# Altium PCB PCB.PcbDoc (part 1 of 2)
Units mm, origin at the board's own origin, x right, y up, seen from the top; angles counter-clockwise.
Board outline 109.77 x 110 mm, 2 copper layers (Top Layer, Bottom Layer); 52 components, 34 nets, 218 pads, 26 vias.
Unrouted connection lines stored in the file: 55.
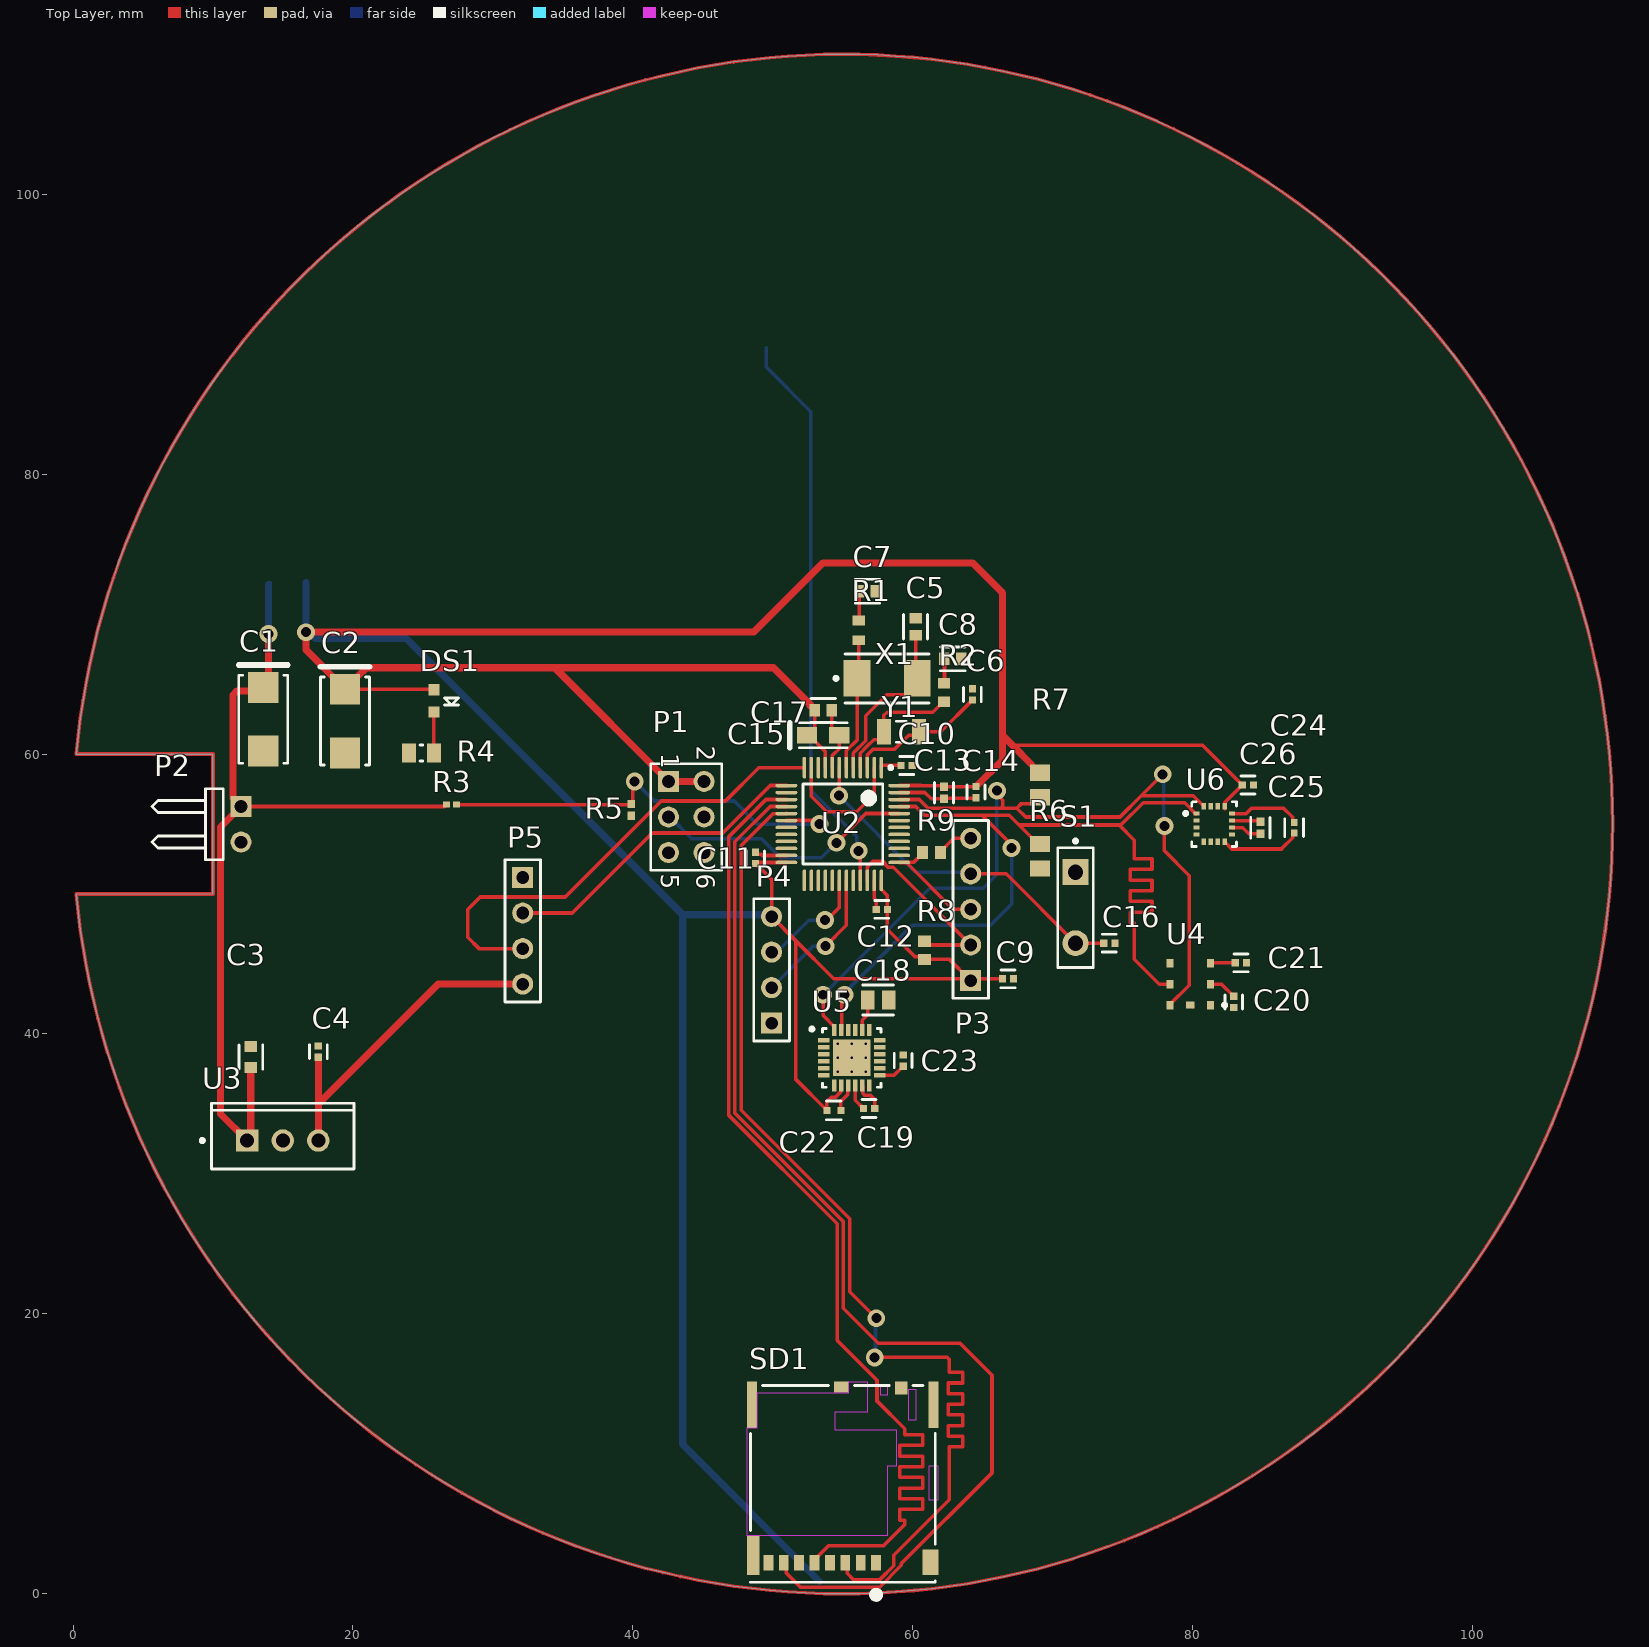
[diagram p0: Top Layer view]
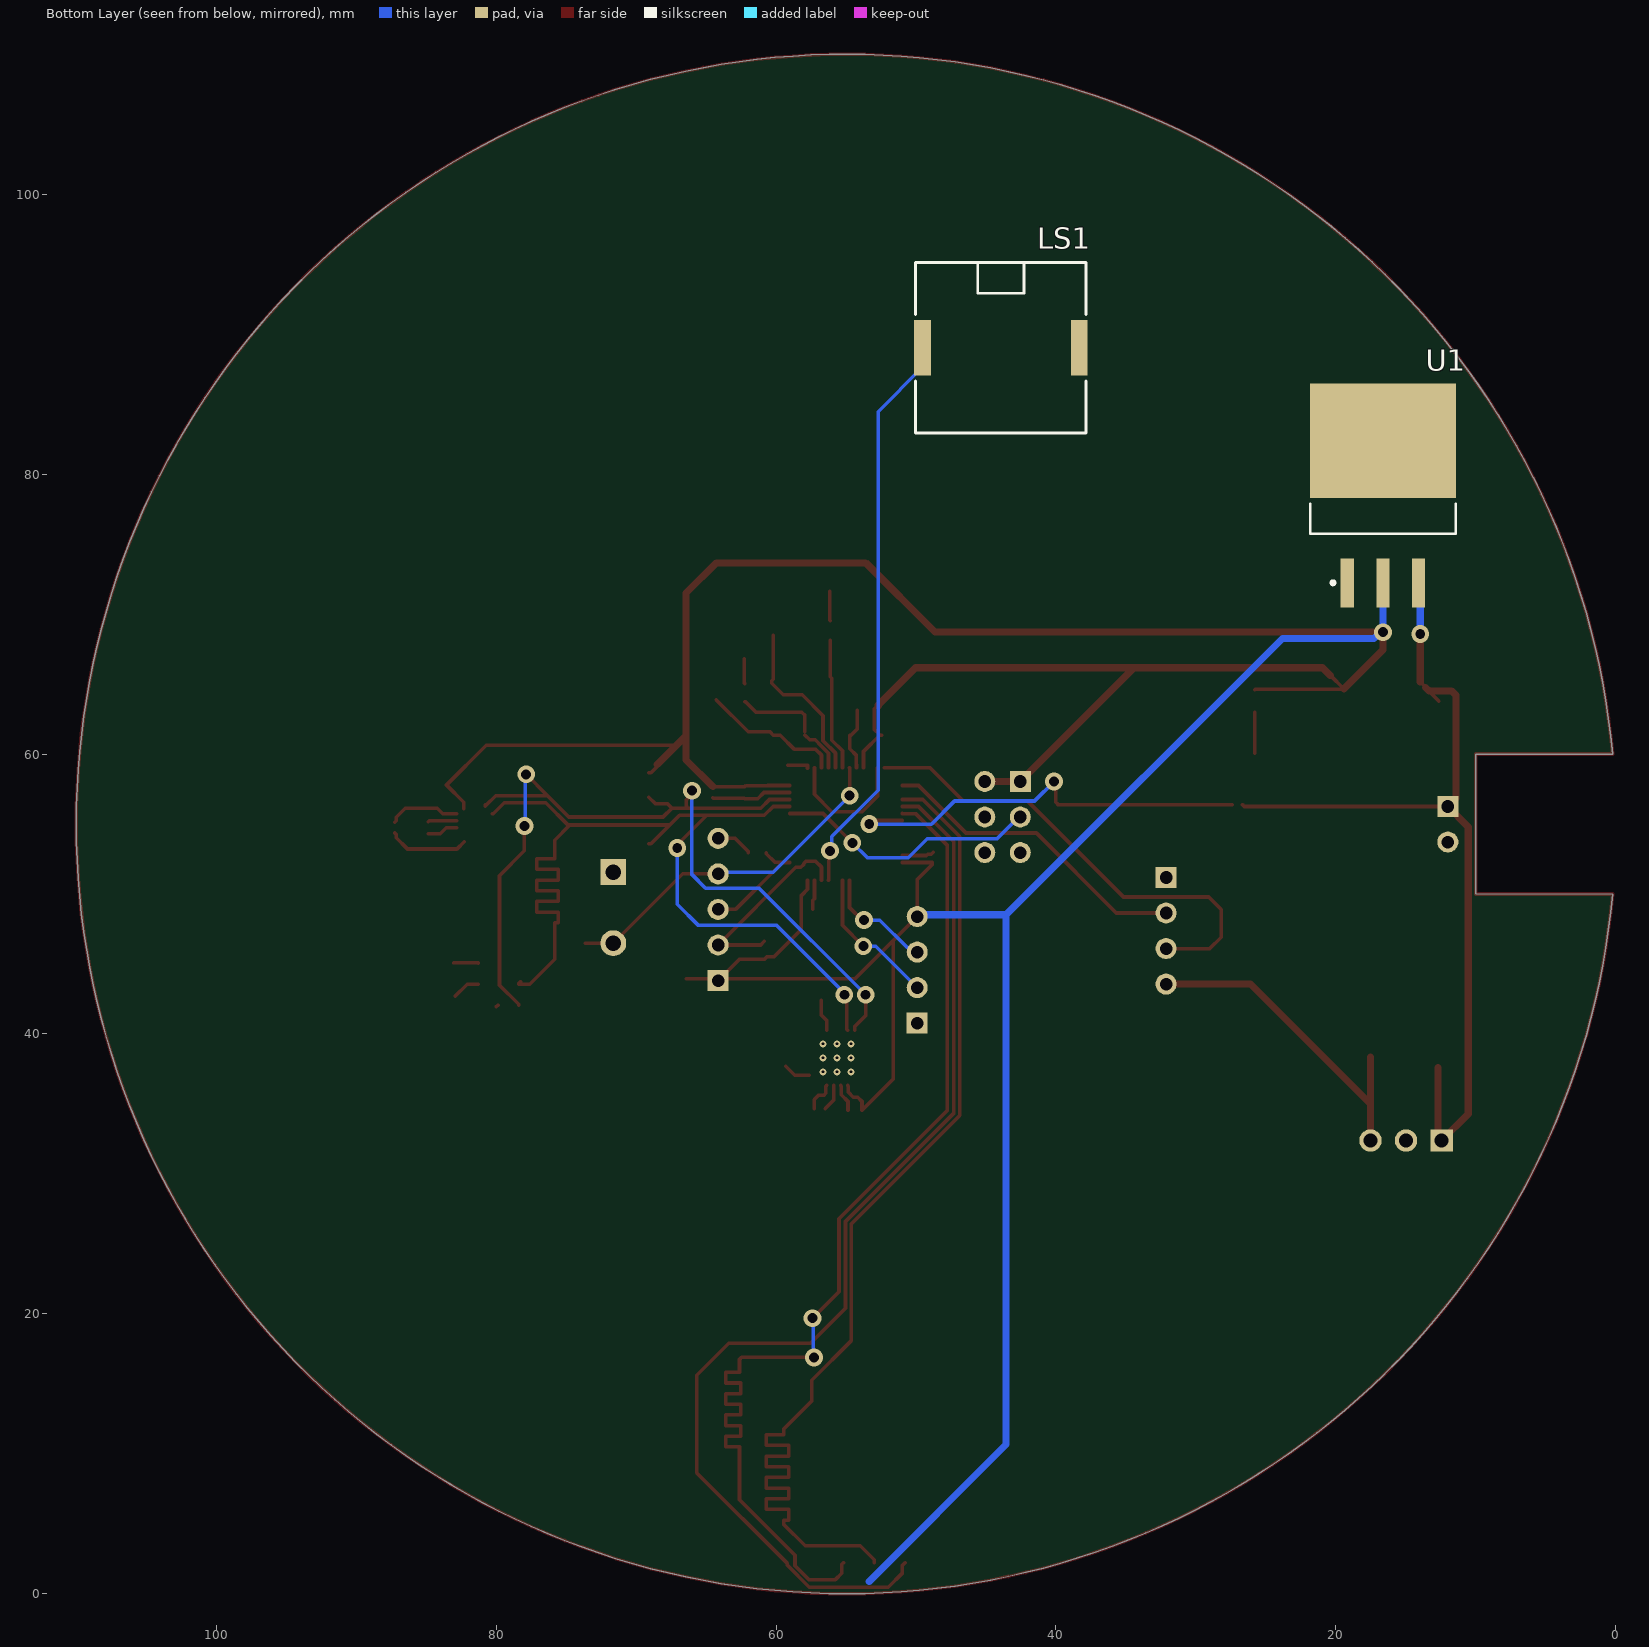
[diagram p1: Bottom Layer view, seen from below]

## Layer stack, top to bottom
Top Solder: solder mask 0.0102, Solder Resist, Dk 3.5
Top Layer: signal copper 0.0356
Dielectric 1: dielectric 0.32, FR-4, Dk 4.8
Bottom Layer: signal copper 0.0356
Bottom Solder: solder mask 0.0102, Solder Resist, Dk 3.5

## Board outline
0.229,49.987 ccw(c55,55) 0.228,60 10,60 10,50

## Design rules (kind name [scope] priority, off if disabled: settings)
Clearance [All] p1: gap=0.1 ignorepadtopadclearanceinfootprint=FALSE except(0: Arc-Hole Track-Hole SMDPad-Hole THPad-Hole Via-Hole Fill-Hole Poly-Hole Region-Hole Text-Hole)
PolygonConnect [All] p1: connectstyle=Relief reliefconductorwidth=0.254 reliefentries=4 polygonreliefangle="90 Angle" airgapwidth=0.254
RoomDefinition Sensors [InComponentClass('Sensors')] p1: confinementstyle=ConfineIn formatcopy=TRUE lockcomponents=FALSE outline 111.125,21.971 127.254,21.971 127.254,40.767 111.125,40.767
RoomDefinition MainBoard [InComponentClass('MainBoard')] p2: confinementstyle=ConfineIn formatcopy=TRUE lockcomponents=FALSE outline 109.474,0 124.968,0 124.968,19.05 109.474,19.05
RoutingVias [All] p1: holewidth=0.711 width=1.27 viastyle="Through Hole" minholewidth=0.711 minwidth=1.27 maxholewidth=0.711 maxwidth=1.27
SMDNeckDown [All] p1: percent=50.000
SolderMaskExpansion [All] p1: expansion=0.102 istentingtop=FALSE
Width [All] p1: maxlimit=0.508 minlimit=0.254 preferedwidth=0.254 minimp=50.000000 maximp=50.000000 favimp=50.000000
30 further rules are at their usual default settings.

## Classes and differential pairs
component class Sensors: C18 C19 C20 C21 C22 C23 C24 C25 C26 LS1 P4 P5 R6 R7 SD1 U4 U5 U6
component class MainBoard: C1 C2 C3 C4 C5 C6 C7 C8 C9 C10 C11 C12 C13 C14 C15 C16 C17 DS1 P1 P2 P3 R1 R2 R3 R4 R5 R8 R9 S1 U1 U2 U3 X1 Y1

## Components (designator, comment, footprint, x,y, rotation, side; value= is the part's Value field where it differs from the comment)
C1 "T491C106K016AT" KEMT-T491-C_L 13.589,62.484 r270 top
C2 "T491C106K016AT" KEMT-T491-C_L 19.431,62.357 r270 top
C3 "CC0603KRX7R7BB334" FP-CC0603-DA-MFG 12.7,38.354 r90 top value="330 nF"
C4 "C0402C104K8PACTU" FP-C0402-BB-MFG 17.526,38.735 r90 top value="0.10 µF"
C5 "C0603C220J4GAC7867" FP-C0603C-CF-MFG 60.198,69.088 r270 top value="22 pF"
C6 "C0402C100K4GACTU" FP-C0402-BB-MFG 64.262,64.262 r270 top value="10 pF"
C7 "C0603C220J4GAC7867" FP-C0603C-CF-MFG 56.769,71.628 r180 top value="22 pF"
C8 "C0603C220J4GAC7867" FP-C0603C-CF-MFG 62.865,66.802 r180 top value="22 pF"
C9 "C0402C104K8PACTU" FP-C0402-BB-MFG 66.802,43.942 r0 top value="0.10 μF"
C10 "C0402C104K8PACTU" FP-C0402-BB-MFG 59.563,59.182 r0 top value="0.10 μF"
C11 "C0402C104K8PACTU" FP-C0402-BB-MFG 48.768,52.578 r90 top value="0.10 µF"
C12 "C0402C104K8PACTU" FP-C0402-BB-MFG 57.785,48.895 r180 top value="0.10 µF"
C13 "GRM155R60J475ME47D" FP-GRM155-0_1-IPC_B 62.23,57.229 r270 top
C14 "C0402C104K8PACTU" FP-C0402-BB-MFG 64.516,57.277 r270 top value="0.10 μF"
C15 "T491A105K016AT" KEMT-T491A105K016AT_L 53.594,61.341 r0 top
C16 "C0402C104K8PACTU" FP-C0402-BB-MFG 74.041,46.482 r0 top value="0.10 μF"
C17 "C0603C103J4HAC7867" FP-C0603C-CF-MFG 53.594,63.119 r0 top value="10,000 pF"
C18 "C0805C222J4GACTU" FP-C0805C-DN-MFG 57.531,42.418 r0 top value="2,200 pF"
C19 "C0402C104K8PACTU" FP-C0402-BB-MFG 56.877,34.671 r0 top value="0.10 μF"
C20 "C0402C104K8PACTU" FP-C0402-BB-MFG 82.931,42.291 r270 top value="0.10 µF"
C21 "C0402C104K8PACTU" FP-C0402-BB-MFG 83.439,45.085 r0 top value="0.10 μF"
C22 "CC0402KRX7R7BB103" FP-CC0402-MFG 54.356,34.544 r0 top value="10 nF"
C23 "C0402C104K8PACTU" FP-C0402-BB-MFG 59.309,38.1 r90 top value="0.10 μF"
C24 "GRM155R71C224KA12D" FP-GRM155-0_05-IPC_C 87.249,54.737 r90 top
C25 "GRM155R60J475ME47D" FP-GRM155-0_1-IPC_B 84.836,54.737 r90 top
C26 "C0402C104K8PACTU" FP-C0402-BB-MFG 83.947,57.785 r0 top value="0.10 μF"
DS1 "150060VS75000" WE-150060VS75000_V 25.781,63.792 r90 top
LS1 "PKLCS1212E2000-R1" FP-PKLCS1212E2000-R1-MFG 43.942,89.027 r180 bottom
P1 "Boot" HDR2X3 42.545,58.039 r270 top
P2 "POWER" HDR1X2H 12,56.25 r270 top locked
P3 "SWD" HDR1X5 64.135,43.815 r90 top
P4 "XBEE" HDR1X4 49.911,40.767 r90 top
P5 "GPS" HDR1X4 32.131,51.181 r270 top
R1 "RC0603FR-07330RL" RESC1608X55X25NL10T15 56.134,68.834 r270 top
R2 "ERJ-3EKF4703V" RESC1608X55X30LL15T15 62.23,64.389 r270 top
R3 "RMCF0402FT1M00" RESC1005X40X25LL10T15 27.051,56.388 r180 top
R4 "RC0805FR-0710KL" RESC2013X60X35NL10T20 24.892,60.071 r180 top
R5 "RC0402FR-07100KL" RESC1005X40X25NL05T10 39.878,56.007 r90 top
R6 "ERJ-6ENF4701V" RESC2013X70X40NL20T20 69.088,52.705 r270 top
R7 "ERJ-6ENF4701V" RESC2013X70X40NL20T20 69.088,57.785 r90 top
R8 "CRCW060310K0FKEA" RESC1609X50X30NL8T20 60.833,45.974 r270 top
R9 "CRCW060310K0FKEA" RESC1609X50X30NL8T20 61.337,52.959 r180 top
S1 "SW-PB" SPST-2 71.628,49.022 r270 top
SD1 "503398-1892" MOLX-503398-1892_V 55,8.5 r180 top
U1 "LD1086D2M33TR" D2PAK_A_L 16.637,78.486 r90 bottom
U2 "STM32F103C8T6" STM-LQFP48_L 55,55 r270 top
U3 "LM7805ACT" FAIR-TO-220-3 14.986,32.385 r90 top
U4 "BMP180" BOSC-BMP180-7_V 79.83,43.561 r180 top
U5 "MPU6050" INSE-QFN-24_V 55.638,38.297 r0 top
U6 "HMC5883L-TR" HONEY-LPCC-16_V 81.534,54.991 r0 top
X1 "ABM7-8.000MHZ-D2Y-T" ABRA-ABM7-2_V 58.166,65.405 r0 top
Y1 "ABS07-120-32.768KHZ-T" ABRA-ABS07_A_V 59.182,61.595 r0 top

## Footprints (in the part's own frame and the unit in brackets; to place one, negate y for a bottom-side part, rotate by r counter-clockwise, add the part's x,y. Pads: shape width x height; smd on the part's side, far side on the other; paste and mask are expansions set on the pad)
ABRA-ABM7-2_V [mm] "SMD, 2-Leads, Body 6x3.5mm"
  rect 1.9x2.6 smd: 1(-2.15,0) 2(2.15,0)
  silkscreen extent -3.77,-1.75 3,1.75, body extent -3,-1.75 3,1.75, height 1.4
ABRA-ABS07_A_V [mm] "SMD, 2-Leads, Body 3.2x1.5mm"
  rect 1x1.8 smd: 1(-1.25,0) 2(1.25,0)
  silkscreen extent -0.35,-0.75 0.35,0.75, body extent -1.6,-0.75 1.6,0.75, height 0.9
BOSC-BMP180-7_V [mm] "LGA, 7-Leads, Body 3.9x3.8mm, Pitch 1.5mm"
  rect 0.5x0.6 smd: 1(-1.45,1.5) 2(-1.45,0) 3(-1.45,-1.5) 4(1.45,-1.5) 5(1.45,0) 6(1.45,1.5)
  rect 0.6x0.5 smd: 7(0,1.5)
  silkscreen extent -2.58,1.38 -2.33,1.62, body extent -1.85,-1.95 1.85,1.95, height 1
D2PAK_A_L [mm] "D2-PAK, 4-Leads, Body 9.2x10.2mm, Pitch 2.54mm, Lead Span 15.4mm, IPC High Density"
  rect 3.5x0.95 smd: 1(-6.25,2.54) 2(-6.25,0) 3(-6.25,-2.54)
  rect 8.2x10.45 smd: 4(3.9,0)
  silkscreen extent -6.37,-5.2 -0.6,5.2, body extent -2.75,-5.2 6.6,5.2, height 4.6
FAIR-TO-220-3 [mm] "FM, 3-Leads, Body 10.2x4.7mm, Pitch 2.54mm"
  rect 1.6x1.6 hole 1: 1(0,2.54)
  round 1.6 hole 1: 2(0,0) 3(0,-2.54)
  silkscreen extent -2.04,-5.1 2.66,5.87, body extent -2.04,-5.1 2.66,5.1, height 18.95
FP-C0402-BB-MFG [mm]
  rect 0.52x0.52 smd paste+0 mask+0: 1(-0.4,0) 2(0.4,0)
  silkscreen extent -0.5,-0.64 0.5,0.64, body extent -0.8,-0.4 0.8,0.4, height 0.25
FP-C0603C-CF-MFG [mm]
  rect 0.75x0.9 smd paste+0 mask+0: 1(-0.6,0) 2(0.6,0)
  silkscreen extent -0.87,-0.85 0.88,0.85, body extent -1.2,-0.6 1.2,0.6, height 0.25
FP-C0805C-DN-MFG [mm]
  rect 0.95x1.35 smd paste+0 mask+0: 1(-0.75,0) 2(0.75,0)
  silkscreen extent -1.1,-1.07 1.1,1.07, body extent -1.4,-0.85 1.4,0.85, height 0.25
FP-CC0402-MFG [mm]
  rect 0.5x0.5 smd paste+0 mask+0: 1(-0.5,0) 2(0.5,0)
  silkscreen extent -0.53,-0.68 0.53,0.67, body extent -0.87,-0.48 0.87,0.48, height 0.25
FP-CC0603-DA-MFG [mm]
  rect 0.8x0.9 smd paste+0 mask+0: 1(-0.75,0) 2(0.75,0)
  silkscreen extent -0.85,-0.85 0.85,0.85, body extent -1.35,-0.75 1.35,0.75, height 0.25
FP-GRM155-0_1-IPC_B [mm]
  rect 0.615x0.572 smd paste+0 mask+0: 1(-0.429,0) 2(0.429,0)
  silkscreen extent -0.74,-0.69 0.74,0.69, body extent -0.89,-0.44 0.89,0.44, height 0.25
FP-GRM155-0_05-IPC_C [mm]
  rect 0.515x0.472 smd paste+0 mask+0: 1(-0.379,0) 2(0.379,0)
  silkscreen extent -0.64,-0.67 0.64,0.67, body extent -0.74,-0.38 0.74,0.38, height 0.25
FP-PKLCS1212E2000-R1-MFG [mm]
  rect 1.2x4 smd paste+0 mask+0: 1(-5.6,0) 2(5.6,0)
  silkscreen extent -6.1,-6.1 6.1,6.1, body extent -6,-6 6,6, height 3.01
HDR1X2H [mm] "Connector; Header; 2 Position; Right Angle"
  rect 1.5x1.5 hole 0.9: 1(0,0)
  round 1.5 hole 0.9: 2(2.54,0)
  silkscreen extent -1.27,-6.35 3.81,-1.27
HDR1X4 [mm] "Connector; Header; 4 Position"
  rect 1.5x1.5 hole 0.9: 1(0,0)
  round 1.5 hole 0.9: 2(2.54,0) 3(5.08,0) 4(7.62,0)
  silkscreen extent -1.27,-1.27 8.89,1.27
HDR1X5 [mm] "Connector; Header; 5 Position"
  rect 1.5x1.5 hole 0.9: 1(0,0)
  round 1.5 hole 0.9: 2(2.54,0) 3(5.08,0) 4(7.62,0) 5(10.16,0)
  silkscreen extent -1.27,-1.27 11.43,1.27
HDR2X3 [mm] "Connector; Header; 3x2 Position"
  rect 1.5x1.5 hole 0.9: 1(0,0)
  round 1.5 hole 0.9: 2(0,2.54) 3(2.54,0) 4(2.54,2.54) 5(5.08,0) 6(5.08,2.54)
  silkscreen extent -1.27,-1.27 6.35,3.81
HONEY-LPCC-16_V [mm] "LPCC, 16-Leads, Body 3x3mm, Pitch 0.5mm"
  rect 0.45x0.3 smd: 1(-1.265,0.75) 2(-1.265,0.25) 3(-1.265,-0.25) 4(-1.265,-0.75) 9(1.275,-0.75) 10(1.275,-0.25) 11(1.275,0.25) 12(1.275,0.75)
  rect 0.3x0.45 smd: 5(-0.75,-1.265) 6(-0.25,-1.265) 7(0.25,-1.265) 8(0.75,-1.265) 13(0.75,1.275) 14(0.25,1.275) 15(-0.25,1.275) 16(-0.75,1.275)
  silkscreen extent -2.16,-1.6 1.6,1.6, body extent -1.5,-1.5 1.5,1.5, height 0.9
INSE-QFN-24_V [mm] "QFN, 24-Leads, Body 4.00x4.00mm, Pitch 0.50mm, Thermal Pad 2.7x2.6mm"
  rect 0.8x0.35 smd: 1(-2,1.25) 2(-2,0.75) 3(-2,0.25) 4(-2,-0.25) 5(-2,-0.75) 6(-2,-1.25) 13(2,-1.25) 14(2,-0.75) 15(2,-0.25) 16(2,0.25) 17(2,0.75) 18(2,1.25)
  rect 0.35x0.85 smd: 7(-1.25,-1.975) 8(-0.75,-1.975) 9(-0.25,-1.975) 10(0.25,-1.975) 11(0.75,-1.975) 12(1.25,-1.975) 19(1.25,1.975) 20(0.75,1.975) 21(0.25,1.975) 22(-0.25,1.975) 23(-0.75,1.975) 24(-1.25,1.975)
  rect 2.7x2.6 smd: 25(0,0)
  silkscreen extent -2.97,-2.1 2.1,2.17, body extent -2,-2 2,2, height 0.95
KEMT-T491-C_L [mm] "Molded Capacitor, 2-Leads, Body 6.30x3.50mm, IPC High Density"
  rect 2.2x2.15 smd: 1(-2.275,0) 2(2.275,0)
  silkscreen extent -3.87,-1.75 3.15,1.75, body extent -3.15,-1.75 3.15,1.75, height 2.79
KEMT-T491A105K016AT_L [mm] "Molded Capacitor, 2-Leads, Body 3.40x1.80mm, IPC High Density"
  rect 1.45x1.15 smd: 1(-1.15,0) 2(1.15,0)
  silkscreen extent -2.38,-0.9 1.7,0.9, body extent -1.92,-0.9 1.92,0.9, height 1.8
MOLX-503398-1892_V [mm] "CONN, 8-Leads, Body 14.05x13.2mm, Pitch 1.1mm"
  rect 0.7x1.1 smd: 1(-2.38,6.27) 2(-1.28,6.27) 3(-0.18,6.27) 4(0.92,6.27) 5(2.02,6.27) 6(3.12,6.27) 7(4.22,6.27) 8(5.32,6.27)
  rect 1.05x0.78 smd: 9(0.095,-6.27)
  rect 0.9x0.93 smd: 10(-4.17,-6.195)
  rect 0.86x2.8 smd: 11(6.4,5.77)
  rect 0.7x3.3 smd: 12(6.48,-5.01) 13(-6.48,-5.01)
  rect 1.14x1.83 smd: 14(-6.26,6.255)
  Top Layer keep-out region: -6.83,-0.63 -6.13,-0.63 -6.13,1.77 -6.83,1.77
  Top Layer keep-out region: -5.235,-6.08 -4.685,-6.08 -4.685,-3.93 -5.235,-3.93
  Top Layer keep-out region: -3.22,-6.28 -2.67,-6.28 -2.67,-5.73 -3.22,-5.73
  Top Layer keep-out region: 6.83,4.37 6.83,-3.36 6.13,-3.36 6.13,-5.88 -0.43,-5.88 -0.43,-6.66 -1.73,-6.66 -1.73,-4.48 0.57,-4.48 0.57,-3.23 -3.82,-3.23 -3.82,-0.63 -3.17,-0.63 -3.17,4.37
  silkscreen extent -6.6,-6.38 6.6,8.82, body extent -6.55,-6.38 6.55,7.67, height 1.28
RESC1005X40X25LL10T15 [mm] "Chip Resistor, 2-Leads, Body 1.1x0.55mm, IPC High Density"
  rect 0.5x0.45 smd: 1(-0.35,0) 2(0.35,0)
  body extent -0.55,-0.28 0.55,0.28, height 0.4
RESC1005X40X25NL05T10 [mm] "Chip Resistor, 2-Leads, Body 1.00x0.50mm, IPC Medium Density"
  rect 0.6x0.55 smd: 1(-0.425,0) 2(0.425,0)
  body extent -0.53,-0.27 0.53,0.28, height 0.4
RESC1608X55X25NL10T15 [mm] "Chip Resistor, 2-Leads, Body 1.70x0.90mm, IPC Medium Density"
  rect 0.7x0.9 smd: 1(-0.7,0) 2(0.7,0)
  body extent -0.85,-0.45 0.85,0.45, height 0.55
RESC1608X55X30LL15T15 [mm] "Chip Resistor, 2-Leads, Body 1.75x0.95mm, IPC High Density"
  rect 0.75x0.85 smd: 1(-0.65,0) 2(0.65,0)
  body extent -0.87,-0.48 0.87,0.48, height 0.55
RESC1609X50X30NL8T20 [mm] "Chip Resistor, 2-Leads, Body 1.65x0.95mm, IPC Medium Density"
  rect 0.8x0.95 smd: 1(-0.65,0) 2(0.65,0)
  body extent -0.82,-0.48 0.82,0.48, height 0.5
RESC2013X60X35NL10T20 [mm] "Chip Resistor, 2-Leads, Body 2.1x1.35mm, IPC Medium Density"
  rect 1x1.35 smd: 1(-0.9,0) 2(0.9,0)
  silkscreen extent -0.1,-0.58 0.1,0.58, body extent -1.05,-0.68 1.05,0.67, height 0.6
RESC2013X70X40NL20T20 [mm] "Chip Resistor, 2-Leads, Body 2.2x1.35mm, IPC Medium Density"
  rect 1.15x1.45 smd: 1(-0.875,0) 2(0.875,0)
  body extent -1.1,-0.72 1.1,0.72, height 0.7
SPST-2 [mm] "Switch; 2 Leads"
  rect 1.85x1.85 hole 1.1: 1(-2.54,0)
  round 1.85 hole 1.1: 2(2.54,0)
  silkscreen extent -4.89,-1.27 4.28,1.27
STM-LQFP48_L [mm] "QFP, 48-Leads, Body 7x7mm, Pitch 0.5mm, IPC High Density"
  oval 1.55x0.25 smd: 1(-4.025,2.75) 2(-4.025,2.25) 3(-4.025,1.75) 4(-4.025,1.25) 5(-4.025,0.75) 6(-4.025,0.25) 7(-4.025,-0.25) 8(-4.025,-0.75) 9(-4.025,-1.25) 10(-4.025,-1.75) 11(-4.025,-2.25) 12(-4.025,-2.75) 25(4.025,-2.75) 26(4.025,-2.25) 27(4.025,-1.75) 28(4.025,-1.25) 29(4.025,-0.75) 30(4.025,-0.25) 31(4.025,0.25) 32(4.025,0.75) 33(4.025,1.25) 34(4.025,1.75) 35(4.025,2.25) 36(4.025,2.75)
  oval 0.25x1.55 smd: 13(-2.75,-4.025) 14(-2.25,-4.025) 15(-1.75,-4.025) 16(-1.25,-4.025) 17(-0.75,-4.025) 18(-0.25,-4.025) 19(0.25,-4.025) 20(0.75,-4.025) 21(1.25,-4.025) 22(1.75,-4.025) 23(2.25,-4.025) 24(2.75,-4.025) 37(2.75,4.025) 38(2.25,4.025) 39(1.75,4.025) 40(1.25,4.025) 41(0.75,4.025) 42(0.25,4.025) 43(-0.25,4.025) 44(-0.75,4.025) 45(-1.25,4.025) 46(-1.75,4.025) 47(-2.25,4.025) 48(-2.75,4.025)
  silkscreen extent -4.15,-2.85 2.85,3.55, body extent -3.5,-3.5 3.5,3.5, height 1.6
WE-150060VS75000_V [mm] "SMD, 2-Leads, Body 1.6x0.8mm"
  rect 0.8x0.8 smd: 1(-0.8,0) 2(0.8,0)
  silkscreen extent -0.3,-1.75 0.2,-0.75, body extent -0.8,-0.4 0.8,0.4, height 0.7

## Part data
C1 C2: library part CMP-2000-07197-1, "Tantalum Capacitor, 10 uF, +/- 10%, 16 V, -55 to 125 degC, 2-Pin SMD (T491-C), RoHS, Tape and Reel", Capacitance=10000000pF, Case Code=C, Case Style=Molded, Manufacturer=Kemet, Operating Temp Range=-55Cto125C, Package / Case=6032-28, Package Description="2-Pin Surface Mount Device, Body 6 x 3.2 mm", Package Reference=T491-C, Tolerance (+ or -)=10%, Voltage=16VDC, Construction=SMTChip, Datasheet URL=http://capacitoredge.kemet.com/capedge2/DataSheet/Datasheet-T491C106K016AT.pdf?pn=T491C106K016AT, Datasheet Version=10/2016, DCL=1.6uA, DF=6%, ESR=1.8ohm, Failure Rate=NotRequired, Lead Spacing (nom)=NotRequiredmm, Length W/Weld=NotRequiredmm, Length W/Weld (max)=NotRequiredmm, Manufacturer URL=http://www.kemet.com/, Mounting Style=SurfaceMount, Mounting Technology=SurfaceMount, Packaging=TapeandReel, Polarity=Polar, Product Depth (mm)=3.2mm, Product Diameter (mm)=NotRequiredmm, Product Height (mm)=2.5mm, Product Length (mm)=6mm, Rad Hardened=No, Seal=NotRequired, Seated Plane Height=NotRequiredmm, Wire Form=NotRequired, Insulation=NotRequired
C3: library part CMP-03422-000838-1, "CAP CER 0.33UF 16V X7R 0603", Capacitance="330 nF", Manufacturer=YAGEO, Package=CC0603-DA, Temperature="-55°C to +125°C", Temperature Characteristic=X7R, Temperature Coefficient=15%, Temperature Range High=+125°C, Temperature Range Low=-55°C, Tolerance=0.1, Voltage="16 V", Automotive=No, Category=Cap, ComponentLink2Description=Datasheet, ComponentLink2URL=http://www.yageo.com/documents/recent/UPY-GPHC_X7R_6.3V-to-50V_18.pdf, Device Class L1="Passive Components", Device Class L2=Capacitors, Device Class L3="Ceramic Capacitors", Digikey Description="CAP CER 0.33UF 16V X7R 0603", Footprint Url=http://www.yageo.com/exep/pages/download/literatures/UPY-C_GEN_24.pdf, Height=0.9mm, Lead Free=Yes, Manufacturer Part Number=CC0603KRX7R7BB334, Material=Ceramic, Mouser Description="Multilayer Ceramic Capacitors MLCC - SMD/SMT 330nF 16V X7R 10%", Octopart=https://octopart.com/cc0603krx7r7bb334-yageo-9291796, RoHS=TRUE, Voltage Rating="16 V"
C4 C9 C10 C11 C12 C14 C16 C19 C20 C21 C23 C26: library part CMP-2008-02046-2, "CAP CER 0.1UF 10V X5R 0402", Capacitance="0.10 μF", Manufacturer=Kemet, Package=C0402-BB, Temperature="-55°C to +125°C", Temperature Characteristic=X5R, Temperature Coefficient=15%, Temperature Range High=+125°C, Temperature Range Low=-55°C, Tolerance=0.1, Voltage Rating="10 V", Automotive=No, Category=Cap, ComponentLink2Description=Datasheet, ComponentLink2URL=https://content.kemet.com/datasheets/KEM_C1002_X7R_SMD.pdf, Device Class L1="Passive Components", Device Class L2=Capacitors, Device Class L3="Ceramic Capacitors", Digikey Description="CAP CER 0.1UF 10V X5R 0402", Height=0.55mm, Lead Free=Yes, Manufacturer Part Number=C0402C104K8PACTU, Material=Ceramic, Mouser Description="Capacitor 100 nF 10 VDC 0402", Octopart=https://octopart.com/c0402c104k8pactu-kemet-140039, RoHS=TRUE, Ipc Land Pattern Name=CAPC10050X50
C5 C7 C8: library part CMP-03020-006720-1, "CAP CER 22PF 16V NP0 0603", Capacitance="22 pF", Manufacturer=KEMET, Package=C0603C-CF, Temperature="-55°C to +125°C", Temperature Characteristic=C0G, Temperature Coefficient=30ppm/°C, Temperature Range High=+125°C, Temperature Range Low=-55°C, Tolerance=0.05, Voltage Rating="16 V", Automotive=Yes, Automotive Grade="Grade 1", Category=Cap, ComponentLink2Description=Datasheet, ComponentLink2URL=https://api.kemet.com/component-edge/download/datasheet/C0603C100J5GACAUTO.pdf, Device Class L1="Passive Components", Device Class L2=Capacitors, Device Class L3="Ceramic Capacitors", Digikey Description="CAP CER 22PF 16V NP0 0603", Height=0.87mm, Lead Free=Yes, Manufacturer Part Number=C0603C220J4GAC7867, Material=Ceramic, Octopart=https://octopart.com/c0603c220j4gac7867-kemet-1963820, RoHS=TRUE
C6: library part CMP-2008-03443-2, "CAP CER 10PF 16V 10% NP0 0402", Capacitance="10 pF", Manufacturer=Kemet, Package=C0402-BB, Temperature="-55°C to +125°C", Temperature Characteristic=C0G, Temperature Coefficient=15%, Temperature Range High=+125°C, Temperature Range Low=-55°C, Tolerance=0.1, Voltage Rating="16 V", Automotive=No, Category=Cap, ComponentLink2Description=Datasheet, ComponentLink2URL=https://content.kemet.com/datasheets/KEM_C1002_X7R_SMD.pdf, Device Class L1="Passive Components", Device Class L2=Capacitors, Device Class L3="Ceramic Capacitors", Digikey Description="CAP CER 10PF 16V 10% NP0 0402", Height=0.55mm, Lead Free=Yes, Manufacturer Part Number=C0402C100K4GACTU, Material=Ceramic, Mouser Description="Multilayer Ceramic Capacitors MLCC - SMD/SMT 16volts 10pF C0G 10%", Octopart=https://octopart.com/c0402c100k4gactu-kemet-12569135, RoHS=TRUE, Ipc Land Pattern Name=CAPC10050X50
C13 C25: library part CMP-2008-04549-2, "Chip Multilayer Ceramic Capacitors for General Purpose, 0402, 4.7uF, X5R, 15%, 20%, 6.3V", Capacitance=4.7uF, Case Code (Metric)=1005, Case Code (Imperial)=0402, Dielectric=X5R, Max Operating Temperature=85°C, Min Operating Temperature=-55°C, Package Quantity=10000, Tolerance=20%, Voltage=6.3V, Case/Package=0402, Contact Plating=Tin, Depth=0.5mm, Height=0.5mm, Lead Free="Lead Free", Length=1mm, Mount="Surface Mount", Packaging="Tape and Reel", REACH SVHC="No SVHC", Termination=SMD/SMT, Thickness=0.022inch, Voltage Rating=6.3V, Voltage Rating (DC)=6.3V, Weight=0.000212oz, Width=0.02inch
C15: library part CMP-2000-07186-1, "Tantalun Capacitor, 1 uF, +/- 10%, 16 V, -55 to 125 degC, 2-Pin SMD, RoHS, Tape and Reel", Capacitance=1.0µF, ESR (Equivalent Series Resistance)=10Ohm, Lifetime @ Temp.=2000Hrs@85°C, Manufacturer=Kemet, Manufacturer Size Code=A, Operating Temperature=-55°C~125°C, Package / Case=1206(3216Metric), Package Description="2-Pin Surface Mounted Device, Body 3.2 x 1.6 mm", Package Reference=1206, Standard Package=1, Tolerance=±10%, Voltage - Rated=16V, Catalog Drawings=T49x,T5xxSeries_A-side1T49x,T5xxSeries_A,B-side2T49x,T5xxSeries_A,SBottom, Category=Capacitors, Datasheet URL=http://capacitoredge.kemet.com/capedge2/DataSheet/Datasheet-T491A105K016AT.pdf?pn=T491A105K016AT, Datasheet Version=06/2016, EDA / CAD Models=DownloadfromAcceleratedDesigns, Family=TantalumCapacitors, Features=GeneralPurpose, Height - Seated (Max)="0.071\"(1.80mm)", Lead Spacing=-, Manufacturer URL=http://www.kemet.com/, Mounting Technology=SurfaceMount, Mounting Type=SurfaceMount, Online Catalog=T491Series, Other Names=399-3678-6, Packaging=Digi-Reel®, Product Training Modules=CapacitorBasics-TypicalUsesforCapacitorsDeratingGuidelinesforSurfaceMountTantalumCapacitors, Series=T491, Size / Dimension="0.126\"Lx0.063\"W(3.20mmx1.60mm)", Type=Molded
C17: library part CMP-03020-017806-1, "CAP CER 0603 10NF 16V ULTRA STAB", Capacitance="10,000 pF", Manufacturer=KEMET, Package=C0603C-CF, Temperature="-55°C to +125°C", Temperature Characteristic=X8R, Temperature Coefficient=30ppm/°C, Temperature Range High=+125°C, Temperature Range Low=-55°C, Tolerance=0.05, Voltage Rating="16 V", Automotive=Yes, Automotive Grade="Grade 1", Category=Cap, ComponentLink2Description=Datasheet, ComponentLink2URL=https://api.kemet.com/component-edge/download/datasheet/C0603C100J5GACAUTO.pdf, Device Class L1="Passive Components", Device Class L2=Capacitors, Device Class L3="Ceramic Capacitors", Digikey Description="CAP CER 0603 10NF 16V ULTRA STAB", Height=0.87mm, Lead Free=Yes, Manufacturer Part Number=C0603C103J4HAC7867, Material=Ceramic, Octopart=https://octopart.com/c0603c103j4hac7867-kemet-88083778, RoHS=TRUE
C18: library part CMP-03020-012538-1, "Capacitor, Ceramic, 2.2Nf, 16Vdc, 5-% Tol, 5+% Tol, C0g-Tc Code, -30, 30Ppm-Tc Rohs Compliant: Yes", Capacitance="2,200 pF", Manufacturer=KEMET, Package=C0805C-DN, Temperature="-55°C to +125°C", Temperature Characteristic=C0G, Temperature Coefficient=30ppm/°C, Temperature Range High=+125°C, Temperature Range Low=-55°C, Tolerance=0.05, Voltage Rating="16 V", Automotive=No, Category=Cap, ComponentLink2Description=Datasheet, ComponentLink2URL=https://content.kemet.com/datasheets/KEM_C1003_C0G_SMD.pdf, Device Class L1="Passive Components", Device Class L2=Capacitors, Device Class L3="Ceramic Capacitors", Digikey Description="Capacitor, Ceramic, 2.2Nf, 16Vdc, 5-% Tol, 5+% Tol, C0g-Tc Code, -30, 30Ppm-Tc Rohs Compliant: Yes", Height=0.88mm, Lead Free=Yes, Manufacturer Part Number=C0805C222J4GACTU, Material=Ceramic, Mouser Description="Capacitor, Ceramic, 2.2Nf, 16Vdc, 5-% Tol, 5+% Tol, C0g-Tc Code, -30, 30Ppm-Tc Rohs Compliant: Yes", Octopart=https://octopart.com/c0805c222j4gactu-kemet-17052493, RoHS=TRUE, Ipc Land Pattern Name=CAPC200125X78
C22: library part CMP-03422-000501-1, "CAP CER 10000PF 16V X7R 0402", Capacitance="10 nF", Manufacturer=YAGEO, Package=CC0402, Temperature="-55°C to +125°C", Temperature Characteristic=X7R, Temperature Coefficient=30ppm/°C, Temperature Range High=+125°C, Temperature Range Low=-55°C, Tolerance=0.1, Voltage Rating="16 V", Automotive=No, Automotive Grade=NA, Category=Cap, ComponentLink2Description=Datasheet, ComponentLink2URL=http://www.yageo.com/documents/recent/UPY-GP_NP0_16V-to-50V_16.pdf, Device Class L1="Passive Components", Device Class L2=Capacitors, Device Class L3="Ceramic Capacitors", Digikey Description="CAP CER 10000PF 16V X7R 0402", Footprint Url=http://www.yageo.com/exep/pages/download/literatures/UPY-C_GEN_24.pdf, Height=0.55mm, Lead Free=Yes, Manufacturer Part Number=CC0402KRX7R7BB103, Material=Ceramic, Mouser Description="0402 10 nF 16 V ±10 % Tolerance X7R SMT Multilayer Ceramic Capacitor", Octopart=https://octopart.com/cc0402krx7r7bb103-yageo-192895, RoHS=TRUE, Ipc Land Pattern Name=CAPC10050X50
C24: library part CMP-1034-02089-3, "Chip Multilayer Ceramic Capacitors for General Purpose, 0402, 0.22uF, X7R, 15%, 10%, 16V", Capacitance=220nF, Case Code (Metric)=1005, Case Code (Imperial)=0402, Dielectric=X7R, Max Operating Temperature=125°C, Min Operating Temperature=-55°C, Package Quantity=1, Tolerance=10%, Voltage=16V, Case/Package=0402, Depth=0.5mm, Height=0.5mm, Lead Free="Lead Free", Length=1mm, Material=Ceramic, Mount="Surface Mount", Packaging="Tape and Reel", Radiation Hardening=No, REACH SVHC="No SVHC", Termination=SMD/SMT, Thickness=0.022inch, Voltage Rating=16V, Voltage Rating (DC)=16V, Width=0.02inch
DS1: library part CMP-1426-00006-4, "WL-SMCW SMD Chip LED Top View Monocolor Waterclear, 30 mA, 2 V, -40 to 85 degC, 2-Pin SMD, RoHS, Tape and Reel", ComponentLink1Description="Manufacturer URL", ComponentLink1URL=https://www.we-online.com/, ComponentLink2Description=Datasheet, ComponentLink2URL=http://katalog.we-online.de/led/datasheet/150060VS75000.pdf, DatasheetVersion="Rev. 2.7", Mounting Technology="Surface Mount", PackageDescription="2-Pin Surface Mount Device, Body 1.6 x 0.8 mm", PartNumber=150060VS75000, RoHSCompliant=True
LS1: library part CMP-06202-000001-1, "AUDIO PIEZO TRANSDUCER 12.5V SMD", Frequency=2kHz, Manufacturer=Murata, Operating Supply Voltage=12.5V, Temperature="-20°C to +70°C", Temperature Range High=+70°C, Temperature Range Low=-20°C, Automotive=No, Category=Speak, ComponentLink2Description=Datasheet, ComponentLink2URL=https://www.murata.com/en-global/products/productdata/8801054425118/SPEC-PKLCS1212E2000-R1.pdf?1517839212000, Device Class L1=Electromechanical, Device Class L2="Audio Products", Device Class L3=Buzzers, Digikey Description="AUDIO PIEZO TRANSDUCER 12.5V SMD", Height=3mm, Lead Free=Yes, Manufacturer Part Number=PKLCS1212E2000-R1, Mouser Description="Piezo buzzer SMD", Octopart=https://octopart.com/pklcs1212e2000-r1-murata-7123179, Package=PKLCS1212E2000-R1, RoHS=TRUE
P1: library part "Header 3X2", "Header, 3-Pin, Dual row", LatestRevisionDate=17-Jul-2002, LatestRevisionNote="Re-released for DXP Platform.", Publisher="Altium Limited"
P2: library part "Header 2H", "Header, 2-Pin, Right Angle", LatestRevisionDate=17-Jul-2002, LatestRevisionNote="Re-released for DXP Platform.", Publisher="Altium Limited"
P3: library part "Header 5", "Header, 5-Pin", LatestRevisionDate=17-Jul-2002, LatestRevisionNote="Re-released for DXP Platform.", Publisher="Altium Limited"
P4 P5: library part "Header 4", "Header, 4-Pin", LatestRevisionDate=17-Jul-2002, LatestRevisionNote="Re-released for DXP Platform.", Publisher="Altium Limited"
R1: library part CMP-1659-00020-2, "Chip Resistor, 330 Ohm, +/- 1%, 0.1 W, -55 to 155 degC, 0603 (1608 Metric), RoHS, Tape and Reel", Capacitance="47 uF", Case Code (Metric)=7343, Case Code (Imperial)=2917, Max Operating Temperature=125degC, Min Operating Temperature=-55degC, Package Quantity=500, Tolerance=10%, Voltage Rating="16 V", Case/Package=2917, ComponentLink1Description="Manufacturer URL", ComponentLink1URL=http://www.yageo.com/, ComponentLink2Description=Datasheet, ComponentLink2URL=http://www.yageo.com/documents/recent/PYu-RC_Group_51_RoHS_L_04.pdf, DatasheetVersion="Rev. 4, 02/2016", ESR="800 mohm", Height="3.1 mm", Length="7.3 mm", Mount="Surface Mount", PackageDescription="2-Pin Surface Mount Device, Body 1.6 x 0.8 mm", PackageReference=0603, Packaging="Tape and Reel", Pins=2, Radiation Hardening=No, REACH SVHC="No SVHC", RoHSCompliant=True, Voltage Rating (DC)="16 V", Width="4.3 mm"
R2: library part CMP-2000-00524-2, "Chip Resistor, 470 KOhm, +/- 1%, 0.1 W, -55 to 155 degC, 0603 (1608 Metric), RoHS, Tape and Reel", Case\Package=SOIC, Clock Frequency="85 MHz", Max Clock Frequency="70 MHz", Max Operating Temperature="85 degC", Max Supply Voltage="3.6 V", Min Operating Temperature="-40 degC", Min Supply Voltage="1.65 V", Nominal Supply Current="15 mA", Nominal Supply Voltage="1.8 V", Package Quantity=98, Access Time="7 ns", ComponentLink1Description="Manufacturer URL", ComponentLink1URL=http://www.panasonic.com/, ComponentLink2Description=Datasheet, ComponentLink2URL=http://industrial.panasonic.com/cdbs/www-data/pdf/RDA0000/AOA0000C86.pdf, DatasheetVersion=Apr-15, Density="4 mb", Mount="Surface Mount", PackageDescription="2-Pin Surface Mount Device, Body 1.6 x 0.85 mm", PackageReference=0603, Packaging=Rail/Tube, Pins=8, Radiation Hardening=No, REACH SVHC=Unknown, RoHSCompliant=true, Interface=SPI
R3: library part CMP-2000-06985-1, "Chip Resistor, 1 MOhm, +/- 1%, 63 mW, -55 to 155 degC, 0402 (1005 Metric), RoHS, Tape and Reel", Manufacturer=Stackpole-Electronics-Inc., Operating Temperature=-55°C~155°C, Package / Case=0402(1005Metric), Package Description="2-Pin Surface Mount Device, Body 1 x 0.5 mm", Package Reference=0402, Power (Watts)=0.063W,1/16W, Resistance (Ohms)=1M, Temperature Coefficient=±100ppm/°C, Tolerance=±1%, Category=Resistors, Composition=ThickFilm, Datasheet URL=https://www.seielect.com/Catalog/SEI-RMCF_RMCP.pdf, Datasheet Version=01/2017, Family=ChipResistor-SurfaceMount, Features=AutomotiveAEC-Q200, Height="0.016\"(0.40mm)", Manufacturer URL=https://www.seielect.com/, Mounting Technology=SurfaceMount, Number of Terminations=2, Packaging=CutTape(CT), Series=RMCF, Size / Dimension="0.039\"Lx0.020\"W(1.00mmx0.50mm)", Supplier Device Package=0402
R4: library part CMP-1659-00013-4, "Chip Resistor, 10 KOhm, +/- 1%, 0.125 W, -55 to 155 degC, 0805 (2012 Metric), RoHS, Tape and Reel", Manufacturer=Yageo, Max Operating Temperature="155 degC", Min Operating Temperature="-55 degC", Package Quantity=5000, Voltage Rating="150 V", ComponentLink1Description="Manufacturer URL", ComponentLink1URL=http://www.yageo.com/, ComponentLink2Description=Datasheet, ComponentLink2URL=http://www.yageo.com/documents/recent/PYu-RC_Group_51_RoHS_L_04.pdf, DatasheetVersion="Rev. 4, 02/2016", Height="0.5 mm", Length="2 mm", Mount="Surface Mount", Mounting Technology="Surface Mount", PackageDescription="2-Pin Surface Mounted Device, Body 2 x 1.25 mm", PackageReference=0805, Packaging="Tape and Reel", Pins=2, REACH SVHC="No SVHC", RoHSCompliant=true
R5: library part CMP-2002-07343-1, Manufacturer="Yageo / Phycomp", Part Number=RC0402FR-07100KL
R6 R7: library part CMP-2001-00550-5, "Chip Resistor, 4.7 KOhm, +/- 1%, 0.125 W, -55 to 155 degC, 0805 (2012 Metric), RoHS, Tape and Reel", Manufacturer=Panasonic, Max Operating Temperature="155 degC", Min Operating Temperature="-55 degC", Package Quantity=5000, Voltage Rating="150 V", ComponentLink1Description="Manufacturer URL", ComponentLink1URL=http://www.panasonic.com/, ComponentLink2Description=Datasheet, ComponentLink2URL=http://industrial.panasonic.com/cdbs/www-data/pdf/RDA0000/AOA0000C86.pdf, DatasheetVersion=04/2015, Height="0.6 mm", Length="2 mm", Mount="Surface Mount", Mounting Technology="Surface Mount", PackageDescription="2-Pin Surface Mount Device, Body 2 x 1.25 mm", PackageReference=0805, Packaging="Tape and Reel", Pins=2, REACH SVHC=Yes, RoHSCompliant=true
R8 R9: library part CMP-1666-00005-4, "Chip Resistor, 10 KOhm, +/- 1%, 100 mW, -55 to 155 degC, 0603 (1608 Metric), RoHS, Tape and Reel", Manufacturer="Vishay Semiconductor", Max Operating Temperature="155 degC", Min Operating Temperature="-55 degC", Package Quantity=5000, Voltage Rating="75 V", ComponentLink1Description="Manufacturer URL", ComponentLink1URL=http://www.vishay.com/, ComponentLink2Description=Datasheet, ComponentLink2URL=https://datasheet.ciiva.com/11809/0900766b80d98afc-11809037.pdf, DatasheetVersion=06/2012, Height="0.45 mm", Length="1.55 mm", Mounting Technology="Surface Mount", PackageDescription="2-Pin Surface Mount Device, Body 1.575 x 0.85 mm", PackageReference=0603, Packaging="Tape and Reel", REACH SVHC=Unknown, RoHSCompliant=true
S1: "Switch", LatestRevisionDate=17-Jul-2002, LatestRevisionNote="Re-released for DXP Platform.", PackageDescription="Switch; 2 Leads", PackageReference=SPST-2, Published=24-Mar-1999, Publisher="Altium Limited"
SD1: library part CMP-2000-05621-1, "Micro SD Connector, Pitch 1.1 mm, 8 Position, Height 1.4 mm, -25 to 85 degC, RoHS, Tape and Reel", Current Rating=500mA, Manufacturer=Molex, Package Description="Micro SD Connector, Pitch 1.1 mm, 8 Position, Height 1.4 mm", Voltage Rating=10VAC/DC, Brand=Molex, Datasheet URL=http://www.molex.com/pdm_docs/sd/5033981892_sd.pdf, Datasheet Version="Rev. E, 04/2006", Factory Pack Quantity=2400, Manufacturer URL=http://www.molex.com/, Mounting Technology=SurfaceMount, Package Reference=503398-1892, Packaging=Reel, Product Category=MemoryCardConnectors, RoHS=Details, Series=503398
U1: library part CMP-0244-00505-1, "1.5A, Low Drop Positive Voltage Regulator, 3.3V, 4-Pin D2PAK/A, Tape and Reel", ComponentLink1Description="Manufacturer URL", ComponentLink1URL=http://www.st.com, ComponentLink2Description=Datasheet, ComponentLink2URL=http://www.st.com/internet/com/TECHNICAL_RESOURCES/TECHNICAL_LITERATURE/DATASHEET/CD00001884.pdf, DatasheetVersion=11/07/2011, PackageDescription="4-Pin Transistor Outline Package 2.54 mm Pitch, 15.4 mm Lead Span", PackageReference=D2PAK_A, PackageVersion=2011
U2: library part CMP-0237-00215-3, "ARM Cortex-M3 32-bit MCU, 64 KB Flash, 20 KB Internal RAM, 37 I/Os, 48-pin LQFP, -40 to 85 degC, Tray", Operating Frequency(F) (Processor speed) (MHz)=72, Supply Voltage(Vcc) min (V)=2, I/Os (High Current)=37, A/D Converter="2x12-bit (10 Channel)", ComponentLink1Description="Manufacturer URL", ComponentLink1URL=http://www.st.com/web/en/home.html, ComponentLink2Description=Datasheet, ComponentLink2URL=http://www.st.com/st-web-ui/static/active/en/resource/technical/document/datasheet/CD00161566.pdf, ComponentLink3Description="Package Specification", ComponentLink3URL=http://www.st.com/st-web-ui/static/active/en/resource/technical/document/datasheet/DM00058181.pdf, Core="ARM Cortex-M3", DatasheetVersion="Rev. 16", FLASH Size (Prog) (kB)=64, Mounting Technology="Surface Mount", PackageDescription="48-Pin Low Profile Quad Flat Package, 7 x 7 mm Body, 0.5 mm Pitch", PackageReference=LQFP48, PackageVersion="Rev. 6, 06/2013", Packing=Tray, PartNumber=STM32F103C8T6, Internal RAM Size (kB)=20
U3: library part CMP-2000-04937-1, "Positive Voltage Regulator, 5 V, 1 A, 0 to 125 degC, 3-Pin TO-220, RoHS, Tube", Dropout Voltage Measurement Current=1A, Manufacturer=Fairchild, Maximum Operating Temperature=+125degC, Maximum Input Voltage=35V, Minimum Operating Temperature=0degC, Output Voltage=5V, Package Description="3-Pin Through Hole Device, Body 10 x 4.5 mm, Pitch 2.54 mm", Package Reference=TO-220, Quiescent Current=6mA, Typical Dropout Voltage @ Current=2V@1A, Datasheet URL=https://datasheet.ciiva.com/5816/1359194-5816420.pdf, Datasheet Version="Rev. 1.0.1, 05/2006", Dimensions=10.67x4.83x16.51mm, Height=16.51mm, Length=10.67mm, Line Regulation=50mV, Load Regulation=100mV, Manufacturer URL=https://www.fairchildsemi.com/, Maximum Output Current=1A, Mounting Type=ThroughHole, Number of Outputs=1, Output Type=Fixed, Package Type=TO-220, Package URL=https://www.fairchildsemi.com/package-drawings/TO/TO220B03.pdf, Pin Count=3, Polarity=Positive, Regulator Function=Linear, Series=LM78xx, Width=4.83mm
U4: library part CMP-2000-05074-1, "Digital Pressure Sensor, 1.8 to 3.6 V, -40 to 85 degC, 7-Pin LGA, RoHS", Manufacturer="Bosch Sensortec", Operating Pressure=4.35PSI~15.95PSI(30kPa~110kPa), Operating Temperature=-40degC~85degC, Package / Case=7-VLGA, Standard Package=5,000, Supplier Device Package=7-LGA, Voltage - Supply=1.62V~3.6V, Accuracy=±2%, Category=Sensors,Transducers, Datasheet URL=http://media.digikey.com/pdf/Data%20Sheets/Bosch/BMP180.pdf, Datasheet Version="Rev. 2.4, 01/2012", EDA / CAD Models=DownloadfromAcceleratedDesigns, Family=PressureSensors,Transducers, For Use With="1528-1434-ND / -BMP180BAROMETRICPRESS/TEMP5V / 1528-1435-ND / -L3GD20HLSM303BMP18010DOFIMU / 1568-1260-ND / -SPARKFUNBAROMETRICPRESSURESEN / 1597-1301-ND / -GROVEBAROMETERSENSOR / 1597-1302-ND / -GROVEIMU10DOF / 1471-1581-ND / -10DOFCLICK / 101040003-ND / -XADOWBAROMETERBMP180V1.0 / 101040004-ND / -XADOW-IMU10DOF / 114990245-ND / -BOARDTPHPRESSURETEMPREV.4 / 828-1028-ND / -BMP180SHUTTLEBOARDFORDEVKIT / 103990031-ND / -TPHBOARDTHETEMPERATUREPRESSU", Manufacturer URL=http://www.bosch-sensortec.com, Maximum Pressure=145.04PSI(1000kPa), Other Names="0273.300.244-1NV / 828-1027-2", Output=16~19b, Output Type=I²C, Port Style=NoPort, Pressure Type=Absolute, Termination Style=PCB
U5: library part CMP-1753-00002-1, "3-Axis Gyroscope, 3-Axis Accelerometer / , 2.375 to 3.46 V, -40 to 105 degC, 24-Pin QFN, RoHS, Tape and Reel", Case Code (Metric)=1608, Case Code (Imperial)=0603, Max Operating Temperature=155degC, Min Operating Temperature=-55degC, Package Quantity=5000, Power Rating="100 mW", Resistance="5.6 kohm", Tolerance=1%, Voltage Rating="75 V", Case/Package=0603, ComponentLink1Description="Manufacturer URL", ComponentLink1URL=http://www.invensense.com/, ComponentLink2Description=Datasheet, ComponentLink2URL=https://datasheet.ciiva.com/1513/1788002-1513632.pdf, DatasheetVersion="Rev. 3.4, 08/2013", Height="0.45 mm", Length="1.6 mm", Mount="Surface Mount", PackageDescription="24-Pin Quad Flat No-lead Package, Body 4 x 4 mm, Pitch 0.5 mm", PackageReference=QFN-24, Packaging="Tape and Reel", Pins=2, Radiation Hardening=No, REACH SVHC=Yes, RoHSCompliant=True, Width="0.8 mm"
U6: library part CMP-2000-05148-1, "Three-Axis Digital Compass IC, 2.16 to 3.6 V, -30 to 85 degC, 16-Pin PLCC, RoHS, Tape and Reel", Current - Supply=100µA, Manufacturer=Honeywell, Operating Temperature=-30degC~85degC, Package / Case=16-LCC, Standard Package=1, Voltage - Supply=2.16V~3.6V, Category=Sensors,Transducers, Datasheet URL=https://datasheet.ciiva.com/1314/1683374-1314148.pdf, Datasheet Version="Rev. C, 04/2012", Dynamic Catalog=HMCSeries, Family=MagneticSensors-HallEffect,DigitalSwitch,Linear,Compass(ICs), Features=Compass-ThreeAxis, Manufacturer URL=http://honeywell.com/Pages/Home.aspx, Other Names=342-1082-6, Output Type=DifferentialVoltage, Packaging=Digi-Reel, Product Change Notification=HMC5883L-TRIdleCurrentChange13/Apr/2012, Product Training Modules=HMC5883LThreeAxisCompassIC, Sensing Range=±8G, Series=HMC, Supplier Device Package=16-LCC, Type=Compass-ThreeAxis
X1: library part CMP-2000-05034-1, "Microprocessor Crystal, 8 MHz, 18 PF, -40 to 85 degC, 2-Pin SMD, RoHS, Tape and Reel", ESR (Equivalent Series Resistance)=100Ohm, Frequency=8MHz, Frequency Stability=±30ppm, Frequency Tolerance=±20ppm, Load Capacitance=18pF, Manufacturer=Abracon, Operating Mode=Fundamental, Operating Temperature=-40degC~85degC, Package / Case=2-SMD, Package Description="2-Pin Surface Mount Device, Body 6 x 3.5 mm", Package Reference=ABM7, Standard Package=1,000, 3D Model="ABM7.pdf /  / ABM7.stp", Catalog Drawings="ABM7SeriesTop /  / ABM7SeriesSide /  / ABM7SeriesBottom", Category=CrystalsandOscillators, Datasheet URL=https://datasheet.ciiva.com/1357/1718755-1357277.pdf, Datasheet Version=Dec-17, Family=Crystals, Featured Product=ABM7andABM11Crystals, Height="0.055\"(1.40mm)", Manufacturer URL=http://www.abracon.com/, Mounting Type=SurfaceMount, Online Catalog=ABM7Series, Other Names="535-9831-2 / ABM7-8.000MHZ-D-2-Y-T / ABM78000MHZD2YT", Packaging=Tape&Reel(TR), RoHS Information=RoHS2/REACHCompliance, Series=ABM7, Size / Dimension="0.236\"Lx0.138\"W(6.00mmx3.50mm)", Type=MHzCrystal
Y1: library part CMP-2000-07587-1, "Tuning Fork Crystal, 32.768 KHz, +/- 20 ppm, -40 to 85 degC, 2-Pin SMD, RoHS, Tape and Reel", Case\/Package=SMD/SMT, ESR (Equivalent Series Resistance)=55KOhm, Frequency=32.768KHz, Frequency Tolerance=20ppm, Load Capacitance=6pF, Manufacturer=Abracon, Max Operating Temperature=85degC, Min Operating Temperature=-40degC, Package Description="2-Pin Surface Mount Device, Body 3.2 x 1.5 mm", Package Quantity=3000, Package Reference=ABS07, Series Resistance=60KOhm, Datasheet URL=http://www.abracon.com/Resonators/ABS07-120-32.768kHz-T.pdf, Datasheet Version=11/2014, Depth=1.5mm, Height=0.035inch, Lead Free=LeadFree, Length=3.2mm, Manufacturer URL=http://www.abracon.com/, Mount=SurfaceMount, Mounting Technology=SurfaceMount, Number of Pins=2, Packaging=TapeandReel, Radiation Hardening=No, REACH SVHC=NoSVHC, RoHSCompliant=True, Termination=SMD/SMT, Tolerance=20ppm, Width=0.061inch

## Via types
v1: diameter 1.27, hole 0.711, Top Layer to Bottom Layer, 17 vias
v2: diameter 0.5, hole 0.2, Top Layer to Bottom Layer, 9 vias

## Nets (pads, with @x,y where several pads share a name; then routed paths per layer and width w, separated by ;. In a path a pad name is that pad's centre, name@x,y a point inside that pad or via, vN(x,y) a via of type N, cw(c..) or ccw(c..) an arc to the next point about the centre after c; other vN are vias at no path point)
+3.3: C2.1 C9.1 C10.1 C11.1 C12.1 C13.1 C14.1 C15.1 C17.1 C20.1 C21.1 C22.1 C23.1 C26.1 DS1.2 P1.1 P1.2 P3.1 P4.4 R6.2 R7.2 R8.2 SD1.4 U1.2 U1.4 U2.1 U2.9 U2.24 U2.36 U2.48 U4.2 U4.3 U5.8 U5.13 U6.2 U6.4 U6.13 | length 318.3
  Top Layer w0.254: C2.1@20.404,65.605 20.379,65.605 19.431,64.657 C2.1 25.741,64.632 DS1.2 ; U2.24 50.973,52.248 48.838,52.248 48.838,52.108 49.911,51.035 P4.4 51.622,46.676 ; C15.1 C15.1@52.546,61.341 ; C17.1@52.671,63.442 52.746,63.442 52.994,63.194 C17.1 52.994,61.789 C15.1@52.546,61.341 ; U2.9 53.75,60.185 52.594,61.341 C15.1@52.546,61.341 ; U5.8 54.84,36.274 54.84,35.853 54.476,35.489 54.17,35.489 53.856,35.175 C22.1 51.622,36.778 51.622,46.676 ; U5.13 58.656,37.047 C23.1 ; U2.36 57.75,50.329 58.185,49.894 C12.1 58.185,47.479 60.134,45.53 60.627,45.53 R8.2 62.626,45.324 P3.1@64.008,43.942 ; U2.1@57.75,58.97 U2.1 57.75,59.18 57.752,59.182 C10.1 ; U2.48 60.581,57.75 60.583,57.748 62.14,57.748 C13.1 62.239,57.667 64.507,57.667 C14.1 ; P3.1 P3.1@64.008,43.942 ; C9.1 P3.1@64.008,43.942 ; 67.116,60.632 80.7,60.632 C26.1 82.307,56.545 U6.13@82.307,56.093 ; 68.49,59.258 68.49,59.108 68.938,58.66 R7.2 ; U4.2 82.061,43.561 C20.1 ; U4.3 81.292,45.073 83.027,45.073 C21.1 ; 51.622,46.676 54.356,43.942 P3.1@64.008,43.942
  Top Layer w0.508: C2.1@19.431,64.657 16.637,67.451 v1(16.637,68.707) 48.641,68.707 53.594,73.66 64.262,73.66 66.421,71.501 66.421,61.327 ; C2.1@20.404,65.605 20.966,66.167 34.417,66.167 ; P1.2 P1.1 34.417,66.167 ; C17.1@52.671,63.442 52.717,63.488 50.038,66.167 34.417,66.167 ; C14.1 66.421,59.582 66.421,61.327 ; 68.49,59.258 67.116,60.632 66.421,61.327
  Bottom Layer w0.508: U1.2 v1(16.637,68.707) 16.843,68.707 17.286,68.264 23.811,68.264 43.561,48.514 ; P4.4 49.784,48.514 43.561,48.514 ; 53.34,0.889 43.561,10.668 43.561,48.514
+5: C4.1 P5.4 U3.3 | length 24.1
  Top Layer w0.508: U3.3 17.526,34.988 ; C4.1 17.526,34.988 ; P5.4 26.099,43.561 17.526,34.988
BAT_IN: C1.1 C3.1 P2.1 R3.2 U1.3 U3.1 | length 64.6
  Top Layer w0.254: P2.1@11.43,56.82 P2.1 26.538,56.25 26.676,56.388 R3.2 ; U3.1 U3.1@12.7,32.639 ; C1.1@12.641,63.786 C1.1@13.359,64.504 ; C1.1 C1.1@13.97,65.14
  Top Layer w0.508: P2.1@11.43,56.82 11.43,64.218 11.728,64.516 13.346,64.516 C1.1 ; P2.1 10.541,54.791 10.541,34.29 U3.1 ; U3.1@12.7,32.639 C3.1 ; C1.1@13.97,65.14 v1(13.97,68.58)
  Bottom Layer w0.254: U1.3@13.97,72.109 U1.3
  Bottom Layer w0.508: v1(13.97,68.58) U1.3@13.97,72.109
BAT_VOL: R3.1 R5.2 U2.18 | length 31.1
  Top Layer w0.254: R3.1 R5.2@39.878,56.388 ; R5.2 40.005,56.559 40.005,57.912 v1(40.132,58.039) ; U2.18 52.806,55.25 53.065,54.991 v1(53.34,54.991)
  Bottom Layer w0.254: v1(40.132,58.039) 41.529,56.642 47.244,56.642 48.895,54.991 v1(53.34,54.991)
BOOT0: P1.3 U2.44 | length 19
  Top Layer w0.254: v1(54.546,53.657) 56.639,55.75 U2.44
  Bottom Layer w0.254: P1.3 42.65,55.499 44.213,53.936 49.188,53.936 50.546,52.578 53.467,52.578 v1(54.546,53.657)
BOOT1: P1.4 U2.20
GND: C1.2 C2.2 C3.2 C4.2 C5.1 C6.1 C7.1 C8.1 C9.2 C10.2 C11.2 C12.2 C13.2 C14.2 C15.2 C16.2 C17.2 C18.2 C19.2 C20.2 C21.2 C22.2 C23.2 C25.2 C26.2 LS1.2 P1.5 P1.6 P2.2 P3.5 P4.1 P5.1 R4.2 R5.1 R9.1 S1.1 SD1.6 SD1.11 SD1.12 SD1.13 SD1.14 U1.1 U2.8 U2.23 U2.35 U2.47 U3.2 U4.7 U5.1 U5.6 U5.9 U5.11 U5.18 U6.9 U6.11 | length 24.9
  Top Layer w0.254: C11.2 48.901,52.845 49.161,52.845 49.256,52.75 U2.23 ; C17.2 54.194,61.789 54.642,61.341 C15.2 54.744,60.385 54.252,59.893 54.252,59.248 54.25,59.246 U2.8 ; C22.2 54.856,35.175 55.34,35.659 55.34,36.274 U5.9 ; U5.11 56.436,36.274 56.436,35.755 56.585,35.606 56.983,35.606 57.277,35.312 C19.2 ; U2.35 57.25,49.678 57.385,49.544 C12.2 ; U2.47 60.86,57.25 61.309,56.801 C13.2 62.268,56.839 64.478,56.839 C14.2 ; R9.1 61.987,53.034 62.928,53.975 P3.5 ; S1.1 S1.1@72.004,51.186 ; U4.7 79.88,42.061 U4.7@80.003,41.938 ; U6.11 84.761,55.241 C25.2
  Top Layer w0.508: U3.2 U3.2@15.113,32.512 ; P5.1@31.877,51.435 P5.1
NetC7_2: C7.2 R1.1 | length 2.1
  Top Layer w0.254: R1.1 56.169,69.569 C7.2
NetC8_2: C8.2 R2.1 | length 1.8
  Top Layer w0.254: R2.1 62.265,65.074 C8.2
NetC18_1: C18.1 U5.20 | length 2.3
  Top Layer w0.254: U5.20 56.388,40.969 56.781,41.362 C18.1
NetC19_1: C19.1 U5.10 | length 1.9
  Top Layer w0.254: U5.10 55.888,35.26 C19.1
NetC24_1: C24.1 U6.8 | length 5.8
  Top Layer w0.254: U6.8 82.797,53.213 86.361,53.213 86.361,53.244 87.14,54.023 87.14,54.249 C24.1
NetC24_2: C24.2 U6.12 | length 5.2
  Top Layer w0.254: U6.12 83.808,55.741 84.201,56.134 86.488,56.134 87.14,55.482 87.14,55.225 C24.2
NetC25_1: C25.1 U6.10 | length 2.2
  Top Layer w0.254: U6.10 83.564,54.741 83.997,54.308 C25.1
NetDS1_1: DS1.1 R4.1 | length 2.9
  Top Layer w0.254: DS1.1 25.781,60.082 R4.1
NetLS1_1: LS1.1 U2.33 | length 40.8
  Top Layer w0.254: v1(56.134,53.086) 56.248,52.972 56.248,50.977 U2.33
  Bottom Layer w0.254: LS1.1 49.542,87.627 52.705,84.464 52.705,57.404 56.007,54.102 56.007,53.213 v1(56.134,53.086)
NetP4_2: P4.2 U2.31 | length 10.4
  Top Layer w0.254: v1(53.763,46.27) 55.25,47.757 U2.31
  Bottom Layer w0.254: P4.2 52.874,46.27 v1(53.763,46.27)
NetP4_3: P4.3 U2.30 | length 8.1
  Top Layer w0.254: v1(53.721,48.133) 53.848,48.133 54.75,49.035 U2.30
  Bottom Layer w0.254: P4.3 50.248,45.847 50.603,46.202 50.647,46.202 52.578,48.133 v1(53.721,48.133)
NetP5_2: P5.2 U2.13 | length 22.6
  Top Layer w0.254: P5.2 35.68,48.641 41.395,54.356 46.425,54.356 49.819,57.75 U2.13
NetP5_3: P5.3 U2.12 | length 34.5
  Top Layer w0.254: P5.3 29.005,46.101 28.194,46.912 28.194,48.888 29.09,49.784 35.179,49.784 42.037,56.642 46.616,56.642 48.999,59.025 U2.12
NetR6_1: R6.1 U2.45 U4.5 U5.23 U6.1 | length 72.1
  Top Layer w0.254: U5.23 54.936,40.32 54.936,42.617 v1(55.118,42.799) ; U2.45 60.209,56.25 60.833,55.626 64.94,55.626 ; v1(67.056,53.283) 67.056,53.51 64.94,55.626 ; 67.627,54.927 74.739,54.927 ; R6.1 68.938,53.58 66.892,55.626 64.94,55.626 ; U4.5@78.257,43.726 78.38,43.603 U4.5 77.597,43.561 75.819,45.339 75.819,47.536 75.819,47.944 75.551,47.944 75.551,48.706 77.089,48.706 77.089,49.468 75.551,49.468 75.551,50.23 77.089,50.23 77.089,50.992 75.551,50.992 75.551,51.754 77.089,51.754 77.089,52.516 75.819,52.516 75.819,52.643 75.819,53.848 74.739,54.927 ; U6.1 80.194,55.741 79.42,56.515 76.454,56.515 74.867,54.927 74.739,54.927
  Bottom Layer w0.254: v1(55.118,42.799) 55.118,42.926 59.944,47.752 65.542,47.752 67.056,49.266 v1(67.056,53.283)
NetR7_1: R7.1 U2.46 U4.6 U5.24 U6.16 | length 71.5
  Top Layer w0.254: v1(53.594,42.799) 53.594,41.316 54.388,40.522 U5.24 ; U2.46 60.471,56.75 61.087,56.134 66.28,56.134 ; v1(66.008,57.383) 66.008,57.108 66.429,56.687 66.429,56.283 66.28,56.134 ; R7.1 68.64,56.462 67.765,56.462 67.437,56.134 ; v1(77.851,58.547) 76.327,57.023 ; v1(77.978,54.864) 77.978,53.086 79.756,51.308 79.756,43.487 78.38,42.111 U4.6 ; U6.16 80.784,56.341 80.761,56.364 80.686,56.364 80.027,57.023 76.327,57.023 ; 66.28,56.134 67.437,56.134 ; 67.437,56.134 68.072,55.499 74.803,55.499 76.327,57.023
  Bottom Layer w0.254: v1(53.594,42.799) 61.214,50.419 65.035,50.419 66.008,51.392 v1(66.008,57.383) ; v1(77.851,58.547) 77.915,58.483 77.915,54.927 v1(77.978,54.864)
NetSD1_2: SD1.2 U2.38
NetSD1_3: SD1.3 U2.17 | length 79.7
  Top Layer w0.254: U2.17 50.973,55.748 50.033,55.748 47.752,53.467 47.752,34.544 55.499,26.797 55.499,21.59 v1(57.394,19.695) ; SD1.3 55.307,2.103 55.307,1.462 55.753,1.016 57.658,1.016 58.643,2.001 58.643,2.763 62.611,6.731 62.611,9.674 ; v1(57.277,16.891) 62.462,16.891 62.611,16.742 62.611,15.995 62.611,15.825 63.577,15.825 63.577,15.063 62.529,15.063 62.529,14.301 63.577,14.301 63.577,13.539 62.529,13.539 62.529,12.777 63.577,12.777 63.577,12.015 62.529,12.015 62.529,11.253 63.577,11.253 63.577,10.491 62.611,10.491 62.611,9.602 62.611,9.547
  Bottom Layer w0.254: v1(57.277,16.891) 57.335,16.949 57.335,19.637 v1(57.394,19.695)
NetSD1_5: SD1.5 U2.15 | length 80.3
  Top Layer w0.254: U2.15 49.511,56.75 46.863,54.102 46.863,34.176 54.61,26.429 54.61,18.102 57.443,15.269 57.443,13.775 59.428,11.79 59.436,11.782 59.436,11.367 60.706,11.367 60.706,10.605 59.083,10.605 59.083,9.843 60.706,9.843 60.706,9.081 59.083,9.081 59.083,8.319 60.706,8.319 60.706,7.557 59.083,7.557 59.083,6.795 60.706,6.795 60.706,6.033 59.083,6.033 59.083,5.271 59.436,5.271 59.436,5.144 59.436,4.953 57.905,3.422 53.972,3.422 52.98,2.43 SD1.5
NetSD1_7: SD1.7 U2.16 | length 80.2
  Top Layer w0.254: SD1.7 50.966,2.044 50.966,1.485 51.974,0.477 57.627,0.477 59.182,2.032 59.182,2.159 65.659,8.636 65.659,15.621 63.373,17.907 57.531,17.907 55.036,20.402 55.036,26.605 47.289,34.352 47.289,53.72 49.819,56.25 U2.16
NRST: C16.1 P3.4 S1.2 U2.7 | length 25.2
  Top Layer w0.254: v1(54.737,57.023) 54.748,57.034 54.748,59.023 U2.7 ; P3.4 66.675,51.435 S1.2 C16.1
  Bottom Layer w0.254: v1(54.737,57.023) 60.198,51.562 P3.4@64.135,51.562
OSC32_IN: C6.2 U2.3 Y1.2 | length 10
  Top Layer w0.254: U2.3 56.75,59.475 56.752,59.477 56.752,59.927 57.15,60.325 58.674,60.325 59.7,61.351 60.188,61.351 Y1.2 61.995,61.595 C6.2
OSC32_OUT: R2.2 U2.4 Y1.1 | length 9.1
  Top Layer w0.254: U2.4 56.25,60.06 56.758,60.568 57.2,61.01 57.601,61.01 Y1.1@57.932,61.341 ; Y1.1 57.932,62.758 58.166,62.992 61.433,62.992 62.18,63.739 R2.2
OSC_IN: C5.2 U2.5 X1.2 | length 12.2
  Top Layer w0.254: U2.5 55.75,60.068 56.642,60.96 56.642,62.738 58.136,64.232 59.493,64.232 60.316,65.055 60.316,65.23 60.198,65.348 C5.2
OSC_OUT: R1.2 U2.6 X1.1 | length 9.5
  Top Layer w0.254: U2.6 55.25,60.226 56.016,60.992 X1.1 56.134,65.523 R1.2
RTC_OUT: U2.2 U2.11 | length 9.4
  Top Layer w0.254: U2.11 52.75,56.978 53.848,55.88 56.007,55.88 57.25,57.123 U2.2
SWCLK: P3.3 R9.2 U2.37 | length 8.6